# Altium PCB 175-00036, rev1, Super Sniffer.PcbDoc (part 4 of 4)
Units mil, origin at the board's own origin, x right, y up, seen from the top; angles counter-clockwise.
Board outline 6299.21 x 7874.02 mil, 5 copper layers (Top Layer (*.GTL), Mid-Layer 1 (*.G1), Internal Plane 1 (*.GP1), Mid-Layer 2  (*.G2), Bottom Layer (*.GBL)); 205 components, 359 nets, 1160 pads, 445 vias.
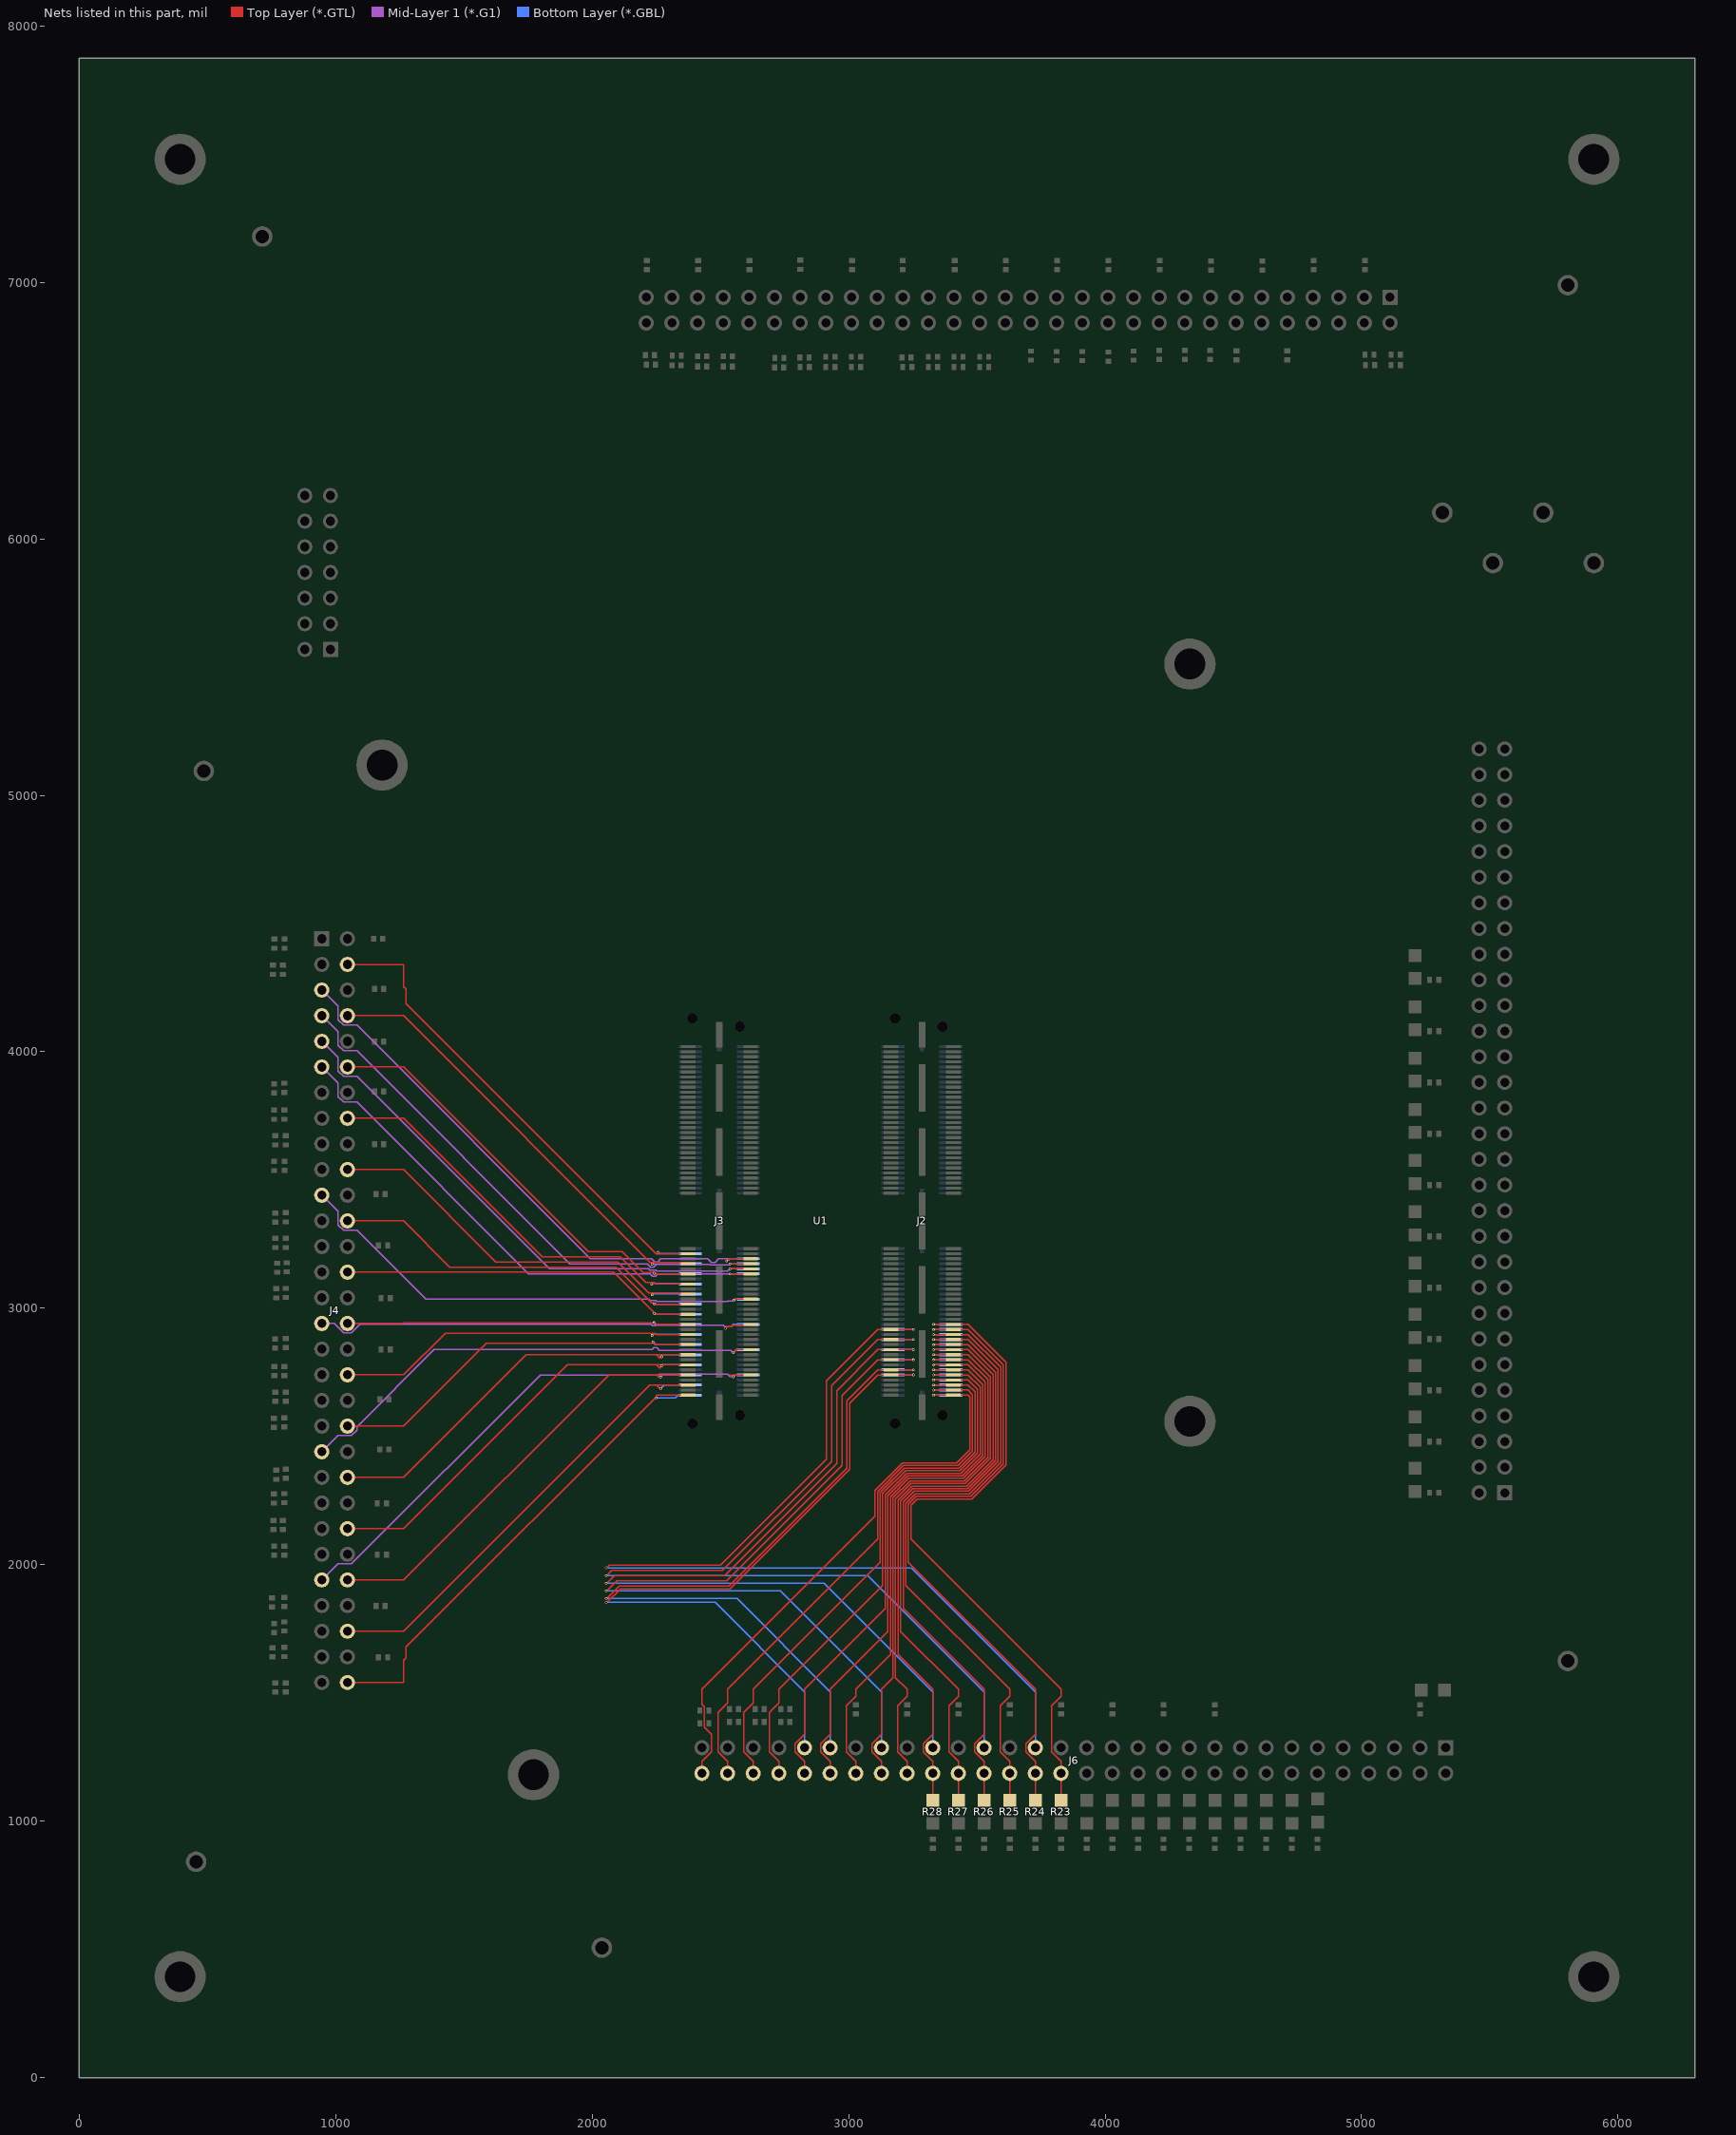
[diagram p7: the nets of this part, all layers, seen from the top]

## Via types
v1: diameter 10, hole 6, Top Layer (*.GTL) to Bottom Layer (*.GBL), 437 vias
v2: diameter 20, hole 10, Top Layer (*.GTL) to Bottom Layer (*.GBL), 8 vias

## Nets (pads, with @x,y where several pads share a name; then routed paths per layer and width w, separated by ;. In a path a pad name is that pad's centre, name@x,y a point inside that pad or via, vN(x,y) a via of type N, cw(c..) or ccw(c..) an arc to the next point about the centre after c; other vN are vias at no path point) (continued)
NetJ2_91: J2.91 J6.32 R23.1 U1.A91 | length 2669.8
  Top Layer (*.GTL) w5: v1(3331.05,2937.13) U1.A91@3408.2,2937.13 3466.05,2937.13 3613.05,2790.13 3613.05,2389.82 3480.04,2256.81 3267.91,2256.81 3243.05,2231.95 3243.05,2099.81 3828.05,1514.81 3828.05,1486.79 3791.02,1449.76 3791.02,1271.47 3828.05,1234.45 J6.32@3828.05,1186.81 R23.1@3828.05,1081.81
  Bottom Layer (*.GBL) w5: v1(3331.05,2937.13) 3331.13,2937.21 J2.91@3399.04,2937.21
NetJ2_93: J2.93 J6.34 R24.1 U1.A93 | length 2608.6
  Top Layer (*.GTL) w5: v1(3331.05,2917.45) U1.A93@3408.2,2917.45 3466.05,2917.45 3603.05,2780.45 3603.05,2393.96 3475.9,2266.81 3263.76,2266.81 3233.05,2236.1 3233.05,2009.81 3728.05,1514.81 3728.05,1339.18 3691.02,1302.15 3691.02,1271.47 3728.05,1234.45 J6.34@3728.05,1186.81 R24.1@3728.05,1081.81
  Bottom Layer (*.GBL) w5: v1(3331.05,2917.45) 3331.11,2917.51 J2.93@3399.04,2917.51
NetJ2_94: J2.94 J6.33 U1.A94 | length 3933.4
  Top Layer (*.GTL) w5: v1(2055.05,1988.35) 2057.72,1988.35 2067.19,1997.81 2500.32,1997.81 2914.05,2411.54 2914.05,2717.45 3114.05,2917.45 U1.A94@3164.9,2917.45 3196.05,2917.45 3196.11,2917.51 v1(3253.05,2917.51)
  Bottom Layer (*.GBL) w5: v1(2055.05,1988.35) 3244.51,1988.35 3728.05,1504.81 J6.33@3728.05,1286.81 ; J2.94@3173.06,2917.51 v1(3253.05,2917.51)
NetJ2_95: J2.95 J6.36 R25.1 U1.A95 | length 2547.5
  Top Layer (*.GTL) w5: v1(3331.05,2897.76) U1.A95@3408.2,2897.76 3466.05,2897.76 3593.05,2770.76 3593.05,2398.1 3471.75,2276.81 3259.62,2276.81 3223.05,2240.24 3223.05,1919.81 3628.05,1514.81 3628.05,1486.79 3591.02,1449.76 3591.02,1271.47 3628.05,1234.45 J6.36@3628.05,1186.81 R25.1@3628.05,1081.81
  Bottom Layer (*.GBL) w5: v1(3331.05,2897.76) 3331.1,2897.81 J2.95@3399.04,2897.81
NetJ2_97: J2.97 J6.38 R26.1 U1.A97 | length 2486.4
  Top Layer (*.GTL) w5: v1(3331.05,2878.08) U1.A97@3408.2,2878.08 3466.05,2878.08 3583.05,2761.08 3583.05,2402.25 3467.61,2286.81 3255.48,2286.81 3213.05,2244.38 3213.05,1829.81 3528.05,1514.81 3528.05,1339.18 3491.02,1302.15 3491.02,1271.47 3528.05,1234.45 J6.38@3528.05,1186.81 R26.1@3528.05,1081.81
  Bottom Layer (*.GBL) w5: v1(3331.05,2878.08) 3331.08,2878.11 J2.97@3399.04,2878.11
NetJ2_98: J2.98 J6.37 U1.A98 | length 3710.5
  Top Layer (*.GTL) w5: v1(2055.05,1958.35) 2057.72,1958.35 2077.19,1977.81 2508.61,1977.81 2934.05,2403.25 2934.05,2698.08 3114.05,2878.08 U1.A98@3164.9,2878.08 3196.05,2878.08 3196.08,2878.11 v1(3253.05,2878.11)
  Bottom Layer (*.GBL) w5: v1(2055.05,1958.35) 3074.51,1958.35 3528.05,1504.81 J6.37@3528.05,1286.81 ; J2.98@3173.06,2878.11 v1(3253.05,2878.11)
NetJ2_99: J2.99 J6.40 R27.1 U1.A99 | length 2425.3
  Top Layer (*.GTL) w5: v1(3331.05,2858.39) U1.A99@3408.2,2858.39 3466.05,2858.39 3573.05,2751.39 3573.05,2406.39 3463.47,2296.81 3251.34,2296.81 3203.05,2248.52 3203.05,1739.81 3428.05,1514.81 3428.05,1486.79 3391.02,1449.76 3391.02,1271.47 3428.05,1234.45 J6.40@3428.05,1186.81 R27.1@3428.05,1081.81
  Bottom Layer (*.GBL) w5: v1@3331.07,2858.41 J2.99@3399.04,2858.41
NetJ2_101: J2.101 J6.42 R28.1 U1.A101 | length 2364.2
  Top Layer (*.GTL) w5: R28.1@3328.05,1081.81 J6.42@3328.05,1186.81 3328.05,1234.45 3291.02,1271.47 3291.02,1302.15 3328.05,1339.18 3328.05,1514.81 3193.05,1649.81 3193.05,2252.66 3247.19,2306.81 3459.33,2306.81 3563.05,2410.53 3563.05,2741.71 3466.05,2838.71 U1.A101@3408.2,2838.71 v1(3331.05,2838.71)
  Bottom Layer (*.GBL) w5: v1(3331.05,2838.71) J2.101@3399.04,2838.71
NetJ2_102: J2.102 J6.41 U1.A102 | length 3487.7
  Top Layer (*.GTL) w5: v1(2055.05,1928.35) 2057.72,1928.35 2087.19,1957.81 2516.89,1957.81 2954.05,2394.97 2954.05,2678.71 3114.05,2838.71 U1.A102@3164.9,2838.71 3196.05,2838.71 v1(3253.05,2838.71)
  Bottom Layer (*.GBL) w5: v1(2055.05,1928.35) 2904.51,1928.35 3328.05,1504.81 J6.41@3328.05,1286.81 ; J2.102@3173.06,2838.71 v1(3253.05,2838.71)
NetJ2_103: J2.103 J6.44 U1.A103 | length 2198.1
  Top Layer (*.GTL) w5: J6.44@3228.05,1186.81 3228.05,1234.45 3191.02,1271.47 3191.02,1449.76 3228.05,1486.79 3228.05,1514.81 3183.05,1559.81 3183.05,2256.81 3243.05,2316.81 3455.18,2316.81 3553.05,2414.67 3553.05,2732.02 3466.05,2819.02 U1.A103@3408.2,2819.02 v1(3331.05,2819.02)
  Bottom Layer (*.GBL) w5: v1(3331.05,2819.02) 3351.04,2819.02 J2.103@3399.04,2819.01
NetJ2_105: J2.105 J6.46 U1.A105 | length 2174.3
  Top Layer (*.GTL) w5: J6.46@3128.05,1186.81 3128.05,1234.45 3091.02,1271.47 3091.02,1302.15 3128.05,1339.18 3128.05,1514.81 3173.05,1559.81 3173.05,2260.95 3238.91,2326.81 3451.04,2326.81 3543.05,2418.82 3543.05,2722.34 3466.05,2799.34 U1.A105@3408.2,2799.34 v1(3331.05,2799.34)
  Bottom Layer (*.GBL) w5: v1(3331.05,2799.34) 3351.02,2799.34 ; 3351.05,2799.31 J2.105@3399.04,2799.31
NetJ2_106: J2.106 J6.45 U1.A106 | length 3264.9
  Top Layer (*.GTL) w5: v1(2055.05,1898.35) 2057.72,1898.35 2097.19,1937.81 2525.17,1937.81 2974.05,2386.68 2974.05,2659.34 3114.05,2799.34 U1.A106@3164.9,2799.34 v1(3253.05,2799.31)
  Bottom Layer (*.GBL) w5: v1(2055.05,1898.35) 2734.51,1898.35 3128.05,1504.81 J6.45@3128.05,1286.81 ; J2.106@3173.06,2799.31 v1(3253.05,2799.31)
NetJ2_107: J2.107 J6.48 U1.A107 | length 2187.7
  Top Layer (*.GTL) w5: J6.48@3028.05,1186.81 3028.05,1234.45 2991.02,1271.47 2991.02,1449.76 3028.05,1486.79 3028.05,1514.81 3163.05,1649.81 3163.05,2265.09 3234.77,2336.81 3446.9,2336.81 3533.05,2422.96 3533.05,2712.65 3466.05,2779.65 U1.A107@3408.2,2779.65 v1(3331.05,2779.65)
  Bottom Layer (*.GBL) w5: v1(3331.05,2779.65) 3351.01,2779.65 3351.05,2779.61 J2.107@3399.04,2779.61
NetJ2_109: J2.109 J6.50 U1.A109 | length 2201.2
  Top Layer (*.GTL) w5: J6.50@2928.05,1186.81 2928.05,1234.45 2891.02,1271.47 2891.02,1302.15 2928.05,1339.18 2928.05,1514.81 3153.05,1739.81 3153.05,2269.23 3230.63,2346.81 3442.76,2346.81 3523.05,2427.1 3523.05,2702.97 3466.05,2759.97 U1.A109@3408.2,2759.97 v1(3331.05,2759.97)
  Bottom Layer (*.GBL) w5: v1(3331.05,2759.97) 3350.99,2759.97 3351.05,2759.91 J2.109@3399.04,2759.91
NetJ2_110: J2.110 J6.49 U1.A110 | length 3042.9
  Top Layer (*.GTL) w5: v1(2055.05,1868.35) 2057.72,1868.35 2106.29,1916.92 2533.83,1916.92 2994.05,2377.13 2994.05,2639.97 3114.05,2759.97 U1.A110@3164.9,2759.97 3252.99,2759.97 v1(3253.05,2759.91)
  Bottom Layer (*.GBL) w5: v1(2055.05,1868.35) 2564.51,1868.35 2928.05,1504.81 J6.49@2928.05,1286.81 ; J2.110@3173.06,2759.91 v1(3253.05,2759.91)
NetJ2_111: J2.111 J6.52 U1.A111 | length 2214.6
  Top Layer (*.GTL) w5: J6.52@2828.05,1186.81 2828.05,1234.45 2791.02,1271.47 2791.02,1302.15 2828.05,1339.18 2828.05,1514.81 3143.05,1829.81 3143.05,2273.37 3226.48,2356.81 3438.62,2356.81 3513.05,2431.24 3513.05,2693.28 3466.05,2740.28 U1.A111@3408.2,2740.28 v1(3331.05,2740.28)
  Bottom Layer (*.GBL) w5: v1(3331.05,2740.28) 3350.98,2740.28 3351.05,2740.21 J2.111@3399.04,2740.21
NetJ2_112: J2.112 J6.51 U1.A112 | length 2932
  Top Layer (*.GTL) w5: v1(2055.05,1853.35) 2057.72,1853.35 2110.69,1906.31 2538.22,1906.31 3004.05,2372.13 3004.05,2630.28 3114.05,2740.28 U1.A112@3164.9,2740.28 3252.98,2740.28 v1(3253.05,2740.21)
  Bottom Layer (*.GBL) w5: v1(2055.05,1853.35) 2479.51,1853.35 2828.05,1504.81 J6.51@2828.05,1286.81 ; J2.112@3173.06,2740.21 v1(3253.05,2740.21)
NetJ2_113: J2.113 J6.54 U1.A113 | length 2228.1
  Top Layer (*.GTL) w5: J6.54@2728.05,1186.81 2728.05,1234.45 2691.02,1271.47 2691.02,1424.76 2728.05,1461.79 2728.05,1514.81 3133.05,1919.81 3133.05,2277.52 3222.34,2366.81 3434.47,2366.81 3503.05,2435.38 3503.05,2683.6 3466.05,2720.6 U1.A113@3408.2,2720.6 v1(3331.05,2720.6)
  Bottom Layer (*.GBL) w5: v1(3331.05,2720.6) 3350.96,2720.6 3351.05,2720.51 J2.113@3399.04,2720.51
NetJ2_115: J2.115 J6.56 U1.A115 | length 2241.6
  Top Layer (*.GTL) w5: J6.56@2628.05,1186.81 2628.05,1234.45 2591.02,1271.47 2591.02,1424.76 2628.05,1461.79 2628.05,1514.81 3123.05,2009.81 3123.05,2281.66 3218.2,2376.81 3430.33,2376.81 3493.05,2439.53 3493.05,2673.91 3466.05,2700.91 U1.A115@3408.2,2700.91 v1(3331.05,2700.91)
  Bottom Layer (*.GBL) w5: v1(3331.05,2700.91) 3350.95,2700.91 3351.05,2700.81 J2.115@3399.04,2700.81
NetJ2_117: J2.117 J6.58 U1.A117 | length 2255
  Top Layer (*.GTL) w5: J6.58@2528.05,1186.81 2528.05,1234.45 2491.02,1271.47 2491.02,1424.76 2528.05,1461.79 2528.05,1514.81 3113.05,2099.81 3113.05,2285.8 3214.06,2386.81 3426.19,2386.81 3483.05,2443.67 3483.05,2664.23 3466.05,2681.23 U1.A117@3408.2,2681.23 v1(3331.05,2681.23)
  Bottom Layer (*.GBL) w5: v1(3331.05,2681.23) 3350.93,2681.23 3351.05,2681.11 J2.117@3399.04,2681.11
NetJ2_119: J2.119 J6.60 U1.A119 | length 2269
  Top Layer (*.GTL) w5: J6.60@2428.05,1186.81 2428.05,1234.45 2465.07,1271.47 2465.07,1339.52 2437.7,1366.89 2437.7,1445.98 2428.05,1455.64 2428.05,1514.81 3103.05,2189.81 3103.05,2289.94 3209.92,2396.81 3422.05,2396.81 3473.05,2447.81 3473.05,2654.54 3466.05,2661.54 U1.A119@3408.2,2661.54 v1(3331.05,2661.54)
  Bottom Layer (*.GBL) w5: v1(3331.05,2661.54) 3350.92,2661.54 3351.05,2661.41 J2.119@3399.04,2661.41 J2.119@3398.64,2661.81
NetJ3_64: J3.64 J4.4 U1.B64 | length 2019.5
  Top Layer (*.GTL) w5: J4.4@1046.05,4340.81 1265.05,4340.81 1265.05,4250.81 1269.19,4250.81 1275.05,4244.95 1275.05,4187.72 2250.05,3212.72 ; v1(2256.89,3218.04) 2255.36,3218.04 2250.05,3212.72 ; U1.B64@2374.74,3212.72 2250.05,3212.72
  Bottom Layer (*.GBL) w5: v1(2256.89,3218.04) 2261.92,3213.01 J3.64@2383.06,3213.01
NetJ3_65: J3.65 J4.5 U1.B65 | length 2278
  Top Layer (*.GTL) w5: v1(2525.05,3183.81) 2526.29,3183.81 2535.52,3193.04 U1.B65@2618.05,3193.04
  Mid-Layer 1 (*.G1) w5: J4.5@946.05,4240.81 1009.02,4177.84 1009.02,4125.47 1030.71,4103.78 1083.07,4103.78 1993.82,3193.04 2232.37,3193.04 2244.87,3180.54 2255.22,3180.54 2267.72,3193.04 2451.07,3193.04 2464.8,3179.31 2479.3,3179.31 2493.02,3193.04 2537.05,3193.04 2531.73,3187.72 2528.96,3187.72 v1(2525.05,3183.81)
  Bottom Layer (*.GBL) w5: v1(2525.05,3183.81) 2534.55,3193.31 J3.65@2609.04,3193.31
NetJ3_67: J3.67 J4.7 U1.B67 | length 2187.8
  Top Layer (*.GTL) w5: v1(2537.05,3173.35) U1.B67@2618.05,3173.35
  Mid-Layer 1 (*.G1) w5: J4.7@946.05,4140.81 1009.02,4077.84 1009.02,4025.47 1030.71,4003.78 1083.07,4003.78 1913.5,3173.35 2214.83,3173.35 2228.87,3159.31 2239.22,3159.31 2250.45,3170.54 2459.43,3170.54 2460.66,3169.31 2533,3169.31 v1(2537.05,3173.35)
  Bottom Layer (*.GBL) w5: v1@2537.31,3173.61 J3.67@2609.04,3173.61
NetJ3_68: J3.68 J4.8 U1.B68 | length 1892.1
  Top Layer (*.GTL) w5: J4.8@1046.05,4140.81 1265.05,4140.81 2227.19,3178.67 2243.2,3178.67 ; v1(2234.05,3171.81) 2242.05,3179.81 2243.2,3178.67 ; U1.B68@2374.74,3173.35 2369.43,3178.67 2243.2,3178.67
  Bottom Layer (*.GBL) w5: v1(2234.05,3171.81) 2235.85,3173.61 J3.68@2383.06,3173.61
NetJ3_69: J3.69 J4.9 U1.B69 | length 2148.8
  Top Layer (*.GTL) w5: v1(2537.05,3153.67) U1.B69@2618.05,3153.67
  Mid-Layer 1 (*.G1) w5: J4.9@946.05,4040.81 1009.02,3977.84 1009.02,3925.47 1030.71,3903.78 1083.07,3903.78 1833.19,3153.67 2220.37,3153.67 2224.73,3149.31 2247.87,3149.31 2251.87,3145.31 2528.69,3145.31 v1(2537.05,3153.67)
  Bottom Layer (*.GBL) w5: v1@2537.29,3153.91 J3.69@2609.04,3153.91
NetJ3_71: J3.71 J4.11 U1.B71 | length 2116.6
  Top Layer (*.GTL) w5: v1(2537.05,3133.98) U1.B71@2618.05,3133.98
  Mid-Layer 1 (*.G1) w5: J4.11@946.05,3940.81 1009.02,3877.84 1009.02,3825.47 1030.71,3803.78 1083.07,3803.78 1752.87,3133.98 2226.2,3133.98 2235.87,3124.31 2246.22,3124.31 2255.9,3133.98 v1(2537.05,3133.98)
  Bottom Layer (*.GBL) w5: v1@2537.28,3134.21 J3.71@2609.04,3134.21
NetJ3_72: J3.72 J4.12 U1.B72 | length 1809.4
  Top Layer (*.GTL) w5: J4.12@1046.05,3940.81 1265.05,3940.81 1985.05,3220.81 2117.35,3220.81 2198.86,3139.3 v1@2243.2,3139.3 ; v1(2241.05,3136.81) 2241.05,3137.14 v1@2243.2,3139.3 ; U1.B72@2374.74,3133.98 2250.05,3133.98 2244.73,3139.3 v1@2243.2,3139.3
  Bottom Layer (*.GBL) w5: v1(2241.05,3136.81) 2243.55,3134.31 2334.95,3134.31 2335.05,3134.21 J3.72@2383.06,3134.21
NetJ3_76: J3.76 J4.16 U1.B76 | length 1764.5
  Top Layer (*.GTL) w5: J4.16@1046.05,3740.81 1265.05,3740.81 1805.05,3200.81 2109.06,3200.81 2209.95,3099.93 2243.2,3099.93 ; v1(2232.05,3092.81) 2234.05,3094.81 2238.09,3094.81 2243.2,3099.93 ; U1.B76@2374.74,3094.61 2248.52,3094.61 2243.2,3099.93
  Bottom Layer (*.GBL) w5: v1(2232.05,3092.81) 2236.67,3097.43 2332.43,3097.43 2335.05,3094.81 J3.76@2383.06,3094.81
NetJ3_80: J3.80 J4.20 U1.B80 | length 1690.7
  Top Layer (*.GTL) w5: J4.20@1046.05,3540.81 1265.05,3540.81 1625.05,3180.81 2100.78,3180.81 2221.03,3060.56 2243.2,3060.56 ; v1(2235.05,3052.81) 2235.05,3053.02 2242.89,3060.87 2243.2,3060.56 ; U1.B80@2374.74,3055.24 2369.43,3060.56 2243.2,3060.56
  Bottom Layer (*.GBL) w5: v1(2235.05,3052.81) 2237.65,3055.41 J3.80@2383.06,3055.41
NetJ3_81: J3.81 J4.21 U1.B81 | length 1930.3
  Top Layer (*.GTL) w5: v1(2553,3031.76) 2556.8,3035.56 U1.B81@2618.05,3035.56
  Mid-Layer 1 (*.G1) w5: J4.21@946.05,3440.81 1009.02,3377.84 1009.02,3325.47 1030.71,3303.78 1083.07,3303.78 1351.3,3035.56 2220.48,3035.56 2225.73,3030.31 2248.87,3030.31 2252.87,3026.31 2527.8,3026.31 2529.86,3028.37 2549.61,3028.37 v1(2553,3031.76)
  Bottom Layer (*.GBL) w5: 2556.95,3035.71 J3.81@2609.04,3035.71
NetJ3_84: J3.84 J4.24 U1.B84 | length 1610.7
  Top Layer (*.GTL) w5: J4.24@1046.05,3340.81 1265.05,3340.81 1445.05,3160.81 2092.5,3160.81 2232.12,3021.19 v1@2243.2,3021.19 ; v1(2241.05,3017.81) 2241.05,3019.03 v1@2243.2,3021.19 ; U1.B84@2374.74,3015.87 2374.3,3016.31 2252.87,3016.31 2252.43,3015.87 2250.05,3015.87 2244.73,3021.19 v1@2243.2,3021.19
  Bottom Layer (*.GBL) w5: v1(2241.05,3017.81) 2242.84,3016.01 J3.84@2383.06,3016.01
NetJ3_88: J3.88 J4.28 U1.B88 | length 1541.7
  Top Layer (*.GTL) w5: J4.28@1046.05,3140.81 2084.21,3140.81 v1@2243.2,2981.82 ; v1(2242.05,2980.81) 2242.2,2980.81 v1@2243.2,2981.82 ; U1.B88@2374.74,2976.5 2373.93,2977.31 2252.87,2977.31 2252.06,2976.5 2250.05,2976.5 2244.73,2981.82 v1@2243.2,2981.82
  Bottom Layer (*.GBL) w5: v1(2242.05,2980.81) 2246.24,2976.61 J3.88@2383.06,2976.61
NetJ3_91: J3.91 J4.31 U1.B91 | length 1815.7
  Top Layer (*.GTL) w5: v1(2520.05,2921.81) 2526.55,2928.31 2542.22,2928.31 2547.22,2933.31 2614.22,2933.31 U1.B91@2618.05,2937.13
  Mid-Layer 1 (*.G1) w5: J4.31@946.05,2940.81 993.68,2940.81 1030.71,2903.78 1061.38,2903.78 1094.73,2937.13 2230.05,2937.13 2235.87,2931.31 2246.22,2931.31 2249.23,2934.32 2511.54,2934.32 2522.05,2923.81 v1(2520.05,2921.81)
  Bottom Layer (*.GBL) w5: v1(2520.05,2921.81) 2526.55,2928.31 2542.22,2928.31 2551.13,2937.21 J3.91@2609.04,2937.21
NetJ3_92: J3.92 J4.32 U1.B92 | length 1479.9
  Top Layer (*.GTL) w5: J4.32@1046.05,2940.81 1265.05,2940.81 1266.68,2942.45 v1@2243.2,2942.45 ; v1(2241.05,2943.81) 2241.05,2944.17 2241.27,2944.39 v1@2243.2,2942.45 ; U1.B92@2374.74,2937.13 2374.56,2937.31 2251.87,2937.31 2251.69,2937.13 2250.05,2937.13 2244.73,2942.45 v1@2243.2,2942.45
  Bottom Layer (*.GBL) w5: v1(2241.05,2943.81) 2247.64,2937.21 J3.92@2383.06,2937.21
NetJ3_96: J3.96 J4.36 U1.B96 | length 1562.2
  Top Layer (*.GTL) w5: J4.36@1046.05,2740.81 1265.05,2740.81 1427.31,2903.08 2243.2,2903.08 ; v1(2234.05,2893.81) 2236.05,2895.81 2236.05,2895.92 2243.2,2903.08 ; U1.B96@2374.74,2897.76 2250.05,2897.76 2244.73,2903.08 2243.2,2903.08
  Bottom Layer (*.GBL) w5: v1(2234.05,2893.81) 2238.55,2898.31 2382.56,2898.31 J3.96@2383.06,2897.81
NetJ3_100: J3.100 J4.40 U1.B100 | length 1623.2
  Top Layer (*.GTL) w5: J4.40@1046.05,2540.81 1265.05,2540.81 1587.94,2863.71 2243.2,2863.71 ; v1(2237.05,2868.81) 2239.05,2866.81 2240.1,2866.81 2243.2,2863.71 ; U1.B100@2374.74,2858.39 2250.05,2858.39 2244.73,2863.71 2243.2,2863.71
  Bottom Layer (*.GBL) w5: v1(2237.05,2868.81) 2247.44,2858.41 J3.100@2383.06,2858.41
NetJ3_101: J3.101 J4.41 U1.B101 | length 1923.9
  Top Layer (*.GTL) w5: v1(2551.05,2826.81) 2562.94,2838.71 U1.B101@2618.05,2838.71
  Mid-Layer 1 (*.G1) w5: J4.41@946.05,2440.81 1009.02,2503.78 1061.38,2503.78 1083.07,2525.47 1083.07,2537.52 1384.27,2838.71 2234.27,2838.71 2241.87,2846.31 2252.22,2846.31 2259.55,2838.99 2259.55,2837.29 2260.63,2836.21 2541.65,2836.21 v1(2551.05,2826.81)
  Bottom Layer (*.GBL) w5: v1(2551.05,2826.81) 2562.95,2838.71 J3.101@2609.04,2838.71
NetJ3_104: J3.104 J4.44 U1.B104 | length 1688.5
  Top Layer (*.GTL) w5: J4.44@1046.05,2340.81 1265.05,2340.81 1743.26,2819.02 2250.05,2819.02 ; v1(2272.05,2810.81) 2272.05,2809.81 2266.05,2809.81 2266.05,2804.81 2265.79,2804.81 2256.89,2813.71 2255.36,2813.71 2250.05,2819.02 ; U1.B104@2374.74,2819.02 2250.05,2819.02
  Bottom Layer (*.GBL) w5: v1(2272.05,2810.81) 2272.05,2809.81 2266.05,2809.81 2275.25,2819.01 J3.104@2383.06,2819.01
NetJ3_108: J3.108 J4.48 U1.B108 | length 1741.6
  Top Layer (*.GTL) w5: J4.48@1046.05,2140.81 1265.05,2140.81 1903.89,2779.65 2250.05,2779.65 ; v1(2271.05,2775.81) 2266.05,2770.81 2266.05,2765.18 2256.89,2774.34 2255.36,2774.34 2250.05,2779.65 ; U1.B108@2374.74,2779.65 2250.05,2779.65
  Bottom Layer (*.GBL) w5: v1(2271.05,2775.81) 2274.85,2779.61 J3.108@2383.06,2779.61
NetJ3_111: J3.111 J4.51 U1.B111 | length 2099.9
  Top Layer (*.GTL) w5: v1(2550.05,2732.81) 2547.89,2734.97 2542.36,2734.97 2537.05,2740.28 U1.B111@2618.05,2740.28
  Mid-Layer 1 (*.G1) w5: J4.51@946.05,1940.81 1009.02,2003.78 1061.38,2003.78 1797.88,2740.28 2257.84,2740.28 2260.87,2743.31 2527.87,2743.31 2537.37,2733.81 2549.05,2733.81 v1(2550.05,2732.81)
  Bottom Layer (*.GBL) w5: v1(2550.05,2732.81) 2557.45,2740.21 J3.111@2609.04,2740.21
NetJ3_112: J3.112 J4.52 U1.B112 | length 1805.9
  Top Layer (*.GTL) w5: J4.52@1046.05,1940.81 1265.05,1940.81 2064.52,2740.28 2252.25,2740.28 ; v1(2266.05,2730.81) 2266.05,2725.81 2262.55,2729.31 2262.55,2729.99 2252.25,2740.28 ; U1.B112@2374.74,2740.28 2252.25,2740.28
  Bottom Layer (*.GBL) w5: v1(2266.05,2730.81) 2275.45,2740.21 J3.112@2383.06,2740.21
NetJ3_116: J3.116 J4.56 U1.B116 | length 1872.2
  Top Layer (*.GTL) w5: J4.56@1046.05,1740.81 1265.05,1740.81 2225.15,2700.91 2250.05,2700.91 ; v1(2268.05,2687.81) 2266.05,2685.81 2266.05,2686.44 2256.89,2695.6 2255.36,2695.6 2250.05,2700.91 ; U1.B116@2374.74,2700.91 2250.05,2700.91
  Bottom Layer (*.GBL) w5: v1(2268.05,2687.81) 2281.05,2700.81 J3.116@2383.06,2700.81
NetJ3_120: J3.120 J4.60 U1.B120 | length 2016.3
  Top Layer (*.GTL) w5: J4.60@1046.05,1540.81 1265.05,1540.81 1265.05,1630.81 1269.19,1630.81 1275.05,1636.67 1275.05,1679.81 v1@2250.05,2654.81 ; v1(2250.05,2650.81) v1@2250.05,2654.81 ; U1.B120@2374.74,2661.54 2250.05,2661.54 v1@2250.05,2654.81
  Bottom Layer (*.GBL) w5: v1(2250.05,2650.81) 2324.44,2650.81 2335.05,2661.41 J3.120@2383.06,2661.41
pads on no net: J2.0 J3.0 U1.0 U1.1
copper on no net: | length 292.9
  Bottom Layer (*.GBL) w10: 4767.62,7345 ccw(c4721,7345) 4767.62,7345

## Polygon pours and split planes (outlines as drawn)
GND on Internal Plane 1 (*.GP1) (split plane): 6279.12,20.1 20.1,20.1 20.1,7853.92 6279.12,7853.92

## Other copper
Top Layer (*.GTL):
  text "*.GTL - TOP LAYER GERBER DATA" at 2199,-1241 h80
Mid-Layer 1 (*.G1):
  text "*.G1 - MID LAYER 1 GERBER DATA" at 2199,-1241 h80
Mid-Layer 2  (*.G2):
  text "*.G2 - MID LAYER 2 GERBER DATA" at 2199,-1241 h80
Bottom Layer (*.GBL):
  text "175-00036, rev1" at 4735,7590 h50
  text "PCB, SUPER SNIFFER" at 4754,7464 h50
  text "c" at 4741,7327 h50
  text "2011, Las Cumbres Observatory" at 4612,7325 h50
  text "*.GBL - BOTTOM LAYER GERBER DATA" at 2199,-1241 h80
Internal Plane 1 (*.GP1) (plane layer: these items are gaps in the copper):
  text "*.GP1 - INTERNAL PLANE LAYER 1 GERBER DATA" at 2199,-1241 h80

## Silkscreen, mask and mechanical layers (free items; w line width, h text height)
Top Overlay:
  rectangle: 1392,7628 1601.05,7784
  text "780-00040 rev:" at 665,7681 h50
  text "SCH, SUPER SNIFFER BOARD" at 653,7552 h50
  text "GND" at 642,7274 h50
  text "GP_Out_D2" at 2236.05,7141.81 h50 r90
  text "GP_Out_D3" at 2436.05,7141.81 h50 r90
  text "GP_Out_D4" at 2636.05,7141.81 h50 r90
  text "GP_Out_D5" at 2836.05,7141.81 h50 r90
  text "GP_Out_D6" at 3036.05,7141.81 h50 r90
  text "GP_Out_D7" at 3236.05,7141.81 h50 r90
  text "GP_Out_D8" at 3436.05,7141.81 h50 r90
  text "GP_Out_D9" at 3636.05,7141.81 h50 r90
  text "GP_Out_D10" at 3836.05,7141.81 h50 r90
  text "GP_Out_D11" at 4036.05,7141.81 h50 r90
  text "GP_Out_D12" at 4236.05,7141.81 h50 r90
  text "GP_Out_D13" at 4436.05,7141.81 h50 r90
  text "GP_Out_D14" at 4636.05,7141.81 h50 r90
  text "GP_Out_D15" at 4836.05,7141.81 h50 r90
  text "GP_Out_D16" at 5036.05,7141.81 h50 r90
  text "GND" at 5743,7095 h50
  text "S2" at 2327.38,7066.81 h50 r90
  text "S3" at 2537.05,7066.81 h50 r90
  text "S4" at 2728.05,7066.81 h50 r90
  text "S5" at 2927.38,7066.81 h50 r90
  text "S6" at 3128.05,7066.81 h50 r90
  text "S7" at 3336.05,7066.81 h50 r90
  text "S8" at 3536.05,7066.81 h50 r90
  text "S9" at 3736.05,7066.81 h50 r90
  text "S11" at 4136.05,7066.81 h50 r90
  text "S12" at 4330.71,7066.81 h50 r90
  text "S13" at 4536.05,7066.81 h50 r90
  text "S14" at 4736.05,7066.81 h50 r90
  text "S15" at 4928.05,7066.81 h50 r90
  text "S16" at 5136.05,7066.81 h50 r90
  text "S10" at 3936.05,7058.81 h50 r90
  text "S1" at 4828.05,6667.81 h50 r90
  text "S0" at 4636.05,6658.01 h50 r90
  text "1" at 2534.05,6603.04 h50 r90
  text "1" at 3034.05,6603.04 h50 r90
  text "1" at 3534.05,6603.04 h50 r90
  text "3" at 2335.38,6593.27 h50 r90
  text "3" at 2835.38,6593.27 h50 r90
  text "3" at 3335.38,6593.27 h50 r90
  text "4" at 4036.05,6592.43 h50 r90
  text "4" at 4436.05,6592.43 h50 r90
  text "2" at 2436.05,6591.81 h50 r90
  text "2" at 2936.05,6591.81 h50 r90
  text "2" at 3436.05,6591.81 h50 r90
  text "2" at 3836.05,6591.81 h50 r90
  text "3" at 3936.05,6591.81 h50 r90
  text "2" at 4236.05,6591.81 h50 r90
  text "3" at 4336.05,6591.81 h50 r90
  text "HomeCom" at 2636.05,6416.81 h50 r90
  text "Step1" at 3736.05,6416.81 h50 r90
  text "~Home4" at 2236.05,6341.81 h50 r90
  text "PosLmtCom" at 3136.05,6341.81 h50 r90
  text "NegLimCom" at 3636.05,6341.81 h50 r90
  text "PosLmt4" at 2736.05,6291.81 h50 r90
  text "NegLim4" at 3236.05,6291.81 h50 r90
  text "GP_Out_D1" at 4736.05,6241.81 h50 r90
  text "GP_Out_D0" at 4536.05,6216.81 h50 r90
  text "Direction1" at 4136.05,6191.81 h50 r90
  text "3.3V" at 5252,6184 h50
  text "-12V" at 5619,6179 h50
  text "Opto_In_Com0" at 4936.05,6175 h50 r90
  text "Opto_Input0" at 5036.05,6141.81 h50 r90
  text "Opto_Input1" at 5136.05,6141.81 h50 r90
  text "+5V" at 5423,5998 h50
  text "+12V" at 5828,5981 h50
  text "GND HEADER" at 741,5650 h50 r90
  text "GND" at 417,5201 h50
  text "DAC_Out0" at 4958.05,5155.81 h50
  text "+5V" at 5683.05,5155.81 h50
  text "DAC_Out1" at 4983.05,5055.81 h50
  text "-12V" at 5658.05,5055.81 h50
  text "DAC_Out2" at 4958.05,4955.81 h50
  text "+12V" at 5658.05,4955.81 h50
  text "DAC_Out3" at 4958.05,4855.81 h50
  text "Analog_In7" at 5683.05,4855.81 h50
  text "DAC_Out4" at 4958.05,4755.81 h50
  text "Analog_In6" at 5683.05,4755.81 h50
  text "DAC_Out5" at 4958.05,4655.81 h50
  text "Analog_In5" at 5683.05,4655.81 h50
  text "DAC_Out6" at 4958.05,4555.81 h50
  text "Analog_In4" at 5683.05,4555.81 h50
  text "DAC_Out7" at 4958.05,4455.81 h50
  text "Analog_In3" at 5683.05,4455.81 h50
  text "Opto_Input2" at 196.05,4415.81 h50
  text "GP_Out_D17" at 1246.05,4415.81 h50
  text "QuadA1+" at 4833.05,4355.81 h50
  text "Analog_In2" at 5683.05,4355.81 h50
  text "S17" at 1172.33,4323.91 h50
  text "Opto_Input3" at 196.05,4315.81 h50
  text "QuadA1-" at 4833.05,4255.81 h50
  text "Analog_In1" at 5683.05,4255.81 h50
  text "EtherRx-" at 446.05,4215.81 h50
  text "GP_Out_D18" at 1246.05,4215.81 h50
  text "QuadB1+" at 4833.05,4155.81 h50
  text "Analog_In0" at 5683.05,4155.81 h50
  text "EtherRx+" at 446.05,4115.81 h50
  text "S18" at 1179.81,4115.81 h50
  text "QuadB1-" at 4833.05,4055.81 h50
  text "Analog_In11" at 5683.05,4055.81 h50
  text "EtherGND" at 446.05,4015.81 h50
  text "GP_Out_D19" at 1246.05,4015.81 h50
  text "Index1+" at 4833.05,3955.81 h50
  text "Analog_In10" at 5683.05,3955.81 h50
  text "S19" at 1171.05,3922.81 h50
  text "Opto_In_Com1" at 271.05,3915.81 h50
  text "Index1-" at 4833.05,3855.81 h50
  text "Analog_In9" at 5683.05,3855.81 h50
  text "Opto_Input4" at 171.05,3815.81 h50
  text "GP_Out_D20" at 1246.05,3815.81 h50
  text "QuadA2+" at 4733.05,3755.81 h50
  text "Analog_In8" at 5683.05,3755.81 h50
  text "S20" at 1163.05,3723 h50
  text "Opto_Input5" at 171.05,3715.81 h50
  text "QuadA2-" at 4733.05,3655.81 h50
  text "USB_VBUS" at 5683.05,3655.81 h50
  text "Opto_Input6" at 171.05,3615.81 h50
  text "GP_Out_D21" at 1246.05,3615.81 h50
  text "QuadB2+" at 4733.05,3555.81 h50
  text "USB_D-" at 5683.05,3555.81 h50
  text "S21" at 1157.65,3518.19 h50
  text "Opto_Input7" at 171.05,3515.81 h50
  text "QuadB2-" at 4733.05,3455.81 h50
  text "USB_D+" at 5683.05,3455.81 h50
  text "Opto_In_Com2" at 271.05,3415.81 h50
  text "GP_Out_D22" at 1246.05,3415.81 h50
  text "Index2+" at 4733.05,3355.81 h50
  text "Analog_In12" at 5683.05,3355.81 h50
  text "Opto_Input8" at 171.05,3315.81 h50
  text "S22" at 1155.05,3315.81 h50
  text "Index2-" at 4733.05,3255.81 h50
  text "Analog_In13" at 5683.05,3255.81 h50
  text "Opto_Input9" at 171.05,3215.81 h50
  text "GP_Out_D23" at 1246.05,3215.81 h50
  text "QuadA3+" at 4833.05,3155.81 h50
  text "Analog_In14" at 5683.05,3155.81 h50
  text "S23" at 1151.5,3122.41 h50
  text "Opto_Input10" at 146.05,3115.81 h50
  text "QuadA3-" at 4833.05,3055.81 h50
  text "Analog_In15" at 5683.05,3055.81 h50
  text "Opto_Input11" at 146.05,3015.81 h50
  text "GP_Out_D24" at 1271.05,3015.81 h50
  text "QuadB3+" at 4833.05,2955.81 h50
  text "nT RST" at 5683.05,2955.81 h50
  text "S24" at 1152.65,2917.51 h50
  text "Opto_In_Com3" at 271.05,2915.81 h50
  text "QuadB3-" at 4833.05,2855.81 h50
  text "nEMU" at 5683.05,2855.81 h50
  text "Opto_Input12" at 146.05,2815.81 h50
  text "GP_Out_D25" at 1271.05,2815.81 h50
  text "Index3+" at 4833.05,2755.81 h50
  text "TDI" at 5683.05,2755.81 h50
  text "S25" at 1151.5,2720.51 h50
  text "Opto_Input13" at 146.05,2715.81 h50
  text "Index3-" at 4833.05,2655.81 h50
  text "TMS" at 5683.05,2655.81 h50
  text "Opto_Input14" at 146.05,2615.81 h50
  text "GP_Out_D26" at 1271.05,2615.81 h50
  text "QuadA4+" at 4733.05,2555.81 h50
  text "TDO" at 5683.05,2555.81 h50
  text "S26" at 1157.33,2517.41 h50
  text "Opto_Input15" at 146.05,2515.81 h50
  text "QuadA4-" at 4733.05,2455.81 h50
  text "TCK" at 5683.05,2455.81 h50
  text "Opto_In_Com4" at 271.05,2415.81 h50
  text "GP_Out_D27" at 1271.05,2415.81 h50
  text "QuadB4+" at 4733.05,2355.81 h50
  text "RS485_H" at 5683.05,2355.81 h50
  text "S27" at 1151.5,2317.41 h50
  text "Opto_Input16" at 146.05,2315.81 h50
  text "QuadB4-" at 4733.05,2255.81 h50
  text "RS485_L" at 5683.05,2255.81 h50
  text "Opto_Input17" at 146.05,2215.81 h50
  text "GP_Out_D28" at 1271.05,2215.81 h50
  text "S28" at 1146.05,2117.81 h50
  text "Opto_Input18" at 146.05,2115.81 h50
  text "Opto_Input_Com6" at 2814.05,2109.81 h50 r270
  text "Opto_Input27" at 2403.05,2061.81 h50 r270
  text "Opto_Input26" at 2503.05,2061.81 h50 r270
  text "Opto_Input25" at 2603.05,2061.81 h50 r270
  text "Opto_Input24" at 2703.05,2061.81 h50 r270
  text "Opto_Out_C7" at 3003.05,2036.81 h50 r270
  text "Opto_Out_C6" at 3203.05,2036.81 h50 r270
  text "Opto_Out_C5" at 3403.05,2036.81 h50 r270
  text "Opto_Out_C4" at 3603.05,2036.81 h50 r270
  text "Opto_Out_C3" at 3803.05,2036.81 h50 r270
  text "Opto_Out_C2" at 4003.05,2036.81 h50 r270
  text "Opto_Out_C1" at 4203.05,2036.81 h50 r270
  text "Opto_Out_C0" at 4403.05,2036.81 h50 r270
  text "Opto_Input19" at 146.05,2015.81 h50
  text "GP_Out_D29" at 1271.05,2015.81 h50
  text "BF-FPGA_TDO" at 4703.05,1961.81 h50 r270
  text "TDO-App_TDI" at 4803.05,1936.81 h50 r270
  text "S29" at 1152.65,1916.92 h50
  text "Opto_In_Com5" at 271.05,1915.81 h50
  text "Index4-" at 5203.05,1911.81 h50 r270
  text "Index4+" at 5303.05,1911.81 h50 r270
  text "Opto_Input20" at 146.05,1815.81 h50
  text "GP_Out_D30" at 1271.05,1815.81 h50
  text "FPGA_TCK" at 4503.05,1811.81 h50 r270
  text "FPGA_TMS" at 4603.05,1811.81 h50 r270
  text "EtherTx+" at 4903.05,1786.81 h50 r270
  text "EtherTx-" at 5003.05,1786.81 h50 r270
  text "S30" at 1148.61,1722.41 h50
  text "Opto_Input21" at 146.05,1715.81 h50
  text "GND" at 5735,1709 h50
  text "Opto_Input22" at 146.05,1615.81 h50
  text "GP_Out_D31" at 1271.05,1615.81 h50
  text "VA25" at 5103.05,1586.81 h50 r270
  text "Opto_Input23" at 146.05,1515.81 h50
  text "S31" at 1152.65,1511.81 h50
  text "E0" at 4303.05,1486.81 h50 r270
  text "E6" at 3103.05,1481.81 h50 r270
  text "E3" at 3703.05,1481.81 h50 r270
  text "E1" at 4103.05,1481.81 h50 r270
  text "E7" at 2904.05,1480.81 h50 r270
  text "E5" at 3304.05,1480.81 h50 r270
  text "E4" at 3504.05,1478.53 h50 r270
  text "E2" at 3903.05,1472.81 h50 r270
  text "CAN_L" at 2403.05,1061.81 h50 r270
  text "CAN_H" at 2503.05,1061.81 h50 r270
  text "CANnode1" at 2603.05,1061.81 h50 r270
  text "CANnode0" at 2703.05,1061.81 h50 r270
  text "I2C_SCL" at 2803.05,1061.81 h50 r270
  text "I2C_SDA" at 2903.05,1061.81 h50 r270
  text "100Mbps" at 3003.05,1061.81 h50 r270
  text "Ether_FD" at 3103.05,1061.81 h50 r270
  text "Ether_Act" at 3203.05,1061.81 h50 r270
  text "SPI_SSEL1" at 4903.05,1061.81 h50 r270
  text "SPI_SS" at 5003.05,1061.81 h50 r270
  text "SPI_MISO" at 5103.05,1061.81 h50 r270
  text "SPI_MOSI" at 5203.05,1061.81 h50 r270
  text "SPI_SCLK" at 5303.05,1061.81 h50 r270
  text "GND" at 400,939 h50
  text "GP_I/Ospare15" at 3303.05,836.81 h50 r270
  text "GP_I/Ospare14" at 3403.05,836.81 h50 r270
  text "GP_I/Ospare13" at 3503.05,836.81 h50 r270
  text "GP_I/Ospare12" at 3603.05,836.81 h50 r270
  text "GP_I/Ospare11" at 3703.05,836.81 h50 r270
  text "GP_I/Ospare10" at 3803.05,836.81 h50 r270
  text "GP_I/Ospare9" at 3903.05,836.81 h50 r270
  text "GP_I/Ospare8" at 4003.05,836.81 h50 r270
  text "GP_I/Ospare7" at 4103.05,836.81 h50 r270
  text "GP_I/Ospare6" at 4203.05,836.81 h50 r270
  text "GP_I/Ospare5" at 4303.05,836.81 h50 r270
  text "GP_I/Ospare4" at 4403.05,836.81 h50 r270
  text "GP_I/Ospare3" at 4503.05,836.81 h50 r270
  text "GP_I/Ospare2" at 4603.05,836.81 h50 r270
  text "GP_I/Ospare1" at 4703.05,836.81 h50 r270
  text "GP_I/Ospare0" at 4803.05,836.81 h50 r270
  text "GND" at 1981,598 h50
  text "*.GTO - TOP OVERLAY GERBER DATA" at 2199,-1241 h80
Bottom Overlay:
  text "*GBO - BOTTOM OVERLAY GERBER DATA" at 2397,-1241 h80
Top Paste:
  text "*.GTP - TOP-SIDE SOLDER PASTE MASK" at 2396.99,-1240.99 h80
Bottom Paste:
  text "*.GBP - BOTTOM-SIDE SOLDER PASTE MASK" at 2396.99,-1240.99 h80
Top Solder:
  text "*.GTS - TOP SOLDER MASK GERBER DATA" at 2397,-1241 h80
Bottom Solder:
  rectangle: 3126,7248 4801,7698
  text "*.GBS - BOTTOM SOLDER MASK GERBER DATA" at 2397,-1241 h80
Mechanical 1:
  the board outline again, w40
Mechanical 2:
  lines w10: -11352,-6728 -11352,9272 9648,9272 9648,-6728 -11352,-6728 ; 5593,-6622 ccw(c5643,-6622) 5643,-6672 5973,-6672 ccw(c5973,-6632) 6013,-6632 6013,-6462 ccw(c5973,-6462) 5973,-6422 5593,-6422 5593,-6622 ; 5593,-6332 ccw(c5643,-6332) 5643,-6382 9543,-6382 ccw(c9543,-6332) 9593,-6332 9593,-6142 ccw(c9543,-6142) 9543,-6092 5593,-6092 5593,-6332 ; 5593,-6002 ccw(c5643,-6002) 5643,-6052 7523,-6052 ccw(c7523,-6002) 7573,-6002 7573,-5852 ccw(c7523,-5852) 7523,-5802 5593,-5802 5593,-6002 ; 5593,-5722 ccw(c5633,-5722) 5633,-5762 6443,-5762 ccw(c6443,-5712) 6493,-5712 6493,-5562 ccw(c6443,-5562) 6443,-5512 5593,-5512 5593,-5722 ; 6053,-6632 ccw(c6093,-6632) 6093,-6672 8053,-6672 ccw(c8053,-6632) 8093,-6632 8093,-6462 ccw(c8053,-6462) 8053,-6422 6053,-6422 6053,-6632 ; 6533,-5712 ccw(c6583,-5712) 6583,-5762 7523,-5762 ccw(c7523,-5712) 7573,-5712 7573,-5562 ccw(c7523,-5562) 7523,-5512 6533,-5512 6533,-5712 ; 7613,-6002 ccw(c7663,-6002) 7663,-6052 9543,-6052 ccw(c9543,-6002) 9593,-6002 9593,-5852 ccw(c9543,-5852) 9543,-5802 7613,-5802 7613,-6002 ; 7613,-5712 ccw(c7663,-5712) 7663,-5762 8603,-5762 ccw(c8603,-5712) 8653,-5712 8653,-5562 ccw(c8603,-5562) 8603,-5512 7613,-5512 7613,-5712 ; 8133,-6622 ccw(c8183,-6622) 8183,-6672 8513,-6672 ccw(c8513,-6632) 8553,-6632 8553,-6462 ccw(c8513,-6462) 8513,-6422 8133,-6422 8133,-6622 ; 8593,-6632 ccw(c8633,-6632) 8633,-6672 9543,-6672 ccw(c9543,-6622) 9593,-6622 9593,-6472 ccw(c9543,-6472) 9543,-6422 8593,-6422 8593,-6632 ; 8693,-5712 ccw(c8743,-5712) 8743,-5762 9543,-5762 ccw(c9543,-5712) 9593,-5712 9593,-5562 ccw(c9543,-5562) 9543,-5512 8693,-5512 8693,-5712
  lines w20: -11331.94,-6082.12 cw(c-11282,-6157) -11282,-6067 ; -11282,-6107 ccw(c-11282,-6157) -11332,-6157 -11332,-6647 ccw(c-11282,-6647) -11282,-6697 -8082,-6697 ccw(c-8082,-6647) -8032,-6647 -8032,-6307 ccw(c-8082,-6307) -8082,-6257 -10722,-6257 ; -8007.12,-6696.94 ccw(c-8082,-6647) -7992,-6647 -7992,-6307 ; 5549.17,-6711.98 cw(c5643,-6622) 5513,-6622 5513,-4952 cw(c5643,-4952) 5643,-4822 9543,-4822 cw(c9543,-4952) 9631.66,-4856.92 ; -3822,-6548 ccw(c-3692,-6548) -3692,-6678 1048,-6678 ccw(c1048,-6548) 1178,-6548 1178,-4958 ccw(c1048,-4958) 1048,-4828 -3692,-4828 ccw(c-3692,-4958) -3822,-4958 -3822,-6548 ; 5553,-6622 ccw(c5643,-6622) 5643,-6712 9543,-6712 ccw(c9543,-6622) 9633,-6622 9633,-4952 ccw(c9543,-4952) 9543,-4862 5643,-4862 ccw(c5643,-4952) 5553,-4952 5553,-6622
  lines w21.65: -10569.92,-2874.44 -4902.52,-2874.44 ; -10569.92,-2497.67 -4902.52,-2497.67 ; -10629.92,-5547.24 ccw(c-10507.87,-5547.24) -10507.87,-5669.29 -4964.57,-5669.29 ccw(c-4964.57,-5547.24) -4842.52,-5547.24 -4842.52,-1893.7 ccw(c-4964.57,-1893.7) -4964.57,-1771.65 -10507.87,-1771.65 ccw(c-10507.87,-1893.7) -10629.92,-1893.7 -10629.92,-5547.24
  lines w24: -1272,-6518 -1122,-6518 ; -1272,-6268 -1122,-6268 ; -1272,-6018 -1122,-6018 ; -1272,-5768 -1122,-5768 ; -1272,-5518 -1122,-5518
  lines w30: -11852,-7228 -11852,9772 10148,9772 10148,-7228 -11852,-7228
  lines w50: 5738,-5363 7388,-5363 ; 5738,-4983 7388,-4983 ; 7388,-5363 7388,-4983 ; 7388,-5363 5728,-5363 5728,-4983 7388,-4983
  text "NOTES (UNLESS OTHERWISE SPECIFIED):" at -11032,8748 h90
  text "GENERAL" at -10932,8548 h90
  text "1)" at -10832,8347.95 h75
  text "PCB IS 5-LAYER, .055\" THICK." at -10632,8347.97 h75
  text "2)" at -10832,8197.95 h75
  text "CONSTRUCTION IS SOLDER-MASK-OVER-BARE-COPPER (SMOBC)." at -10632,8197.95 h75
  text "3)" at -10832,8047.95 h75
  text "ACCEPTABILITY SHALL BE BASED ON IPC-A-600, CLASS 2." at -10632,8047.95 h75
  text "4)" at -10832,7897.95 h75
  text "THE FOLLOWING GERBER RS274X PHOTO TOOL FILES SHALL BE USED TO DEFINE ALL CIRCUIT FEATURES:" at -10632,7897.95 h75
  text "*.GTL - TOP LAYER GERBER DATA" at -10358,7687 h80
  text "*.G1 - MID LAYER 1 GERBER DATA" at -10358,7533.33 h80
  text "*.G2 - MID LAYER 2 GERBER DATA" at -10358,7379.67 h80
  text "*.GP1 - INTERNAL PLANE LAYER 1 GERBER DATA" at -10370.01,7244.09 h80
  text "*.GBL - BOTTOM LAYER GERBER DATA" at -10358,7074.34 h80
  text "*.GTO - TOP OVERLAY GERBER DATA" at -10358,6920.67 h80
  text "*.GTS - TOP SOLDER MASK GERBER DATA" at -10358,6767.01 h80
  text "*.GTP - TOP-SIDE SOLDER PASTE MASK" at -10358.01,6613.33 h80
  text "*GBO - BOTTOM OVERLAY GERBER DATA" at -10358,6459.68 h80
  text "*.GBS - BOTTOM SOLDER MASK GERBER DATA" at -10358,6306.01 h80
  text "*.GBP - BOTTOM-SIDE SOLDER PASTE MASK" at -10358.01,6152.34 h80
  text "5)" at -10929,4666.23 h75
  text "THE PHOTO TOOL SHALL NOT BE COMPENSATED WITHOUT PRIOR ENGINEERING APPROVAL." at -10729,4666.23 h75
  text "PCB DESIGNER: RICH LOBDILL   PH (805) 880-1621  FAX (805) 961-1792." at -10729,4516.28 h75
  text "FABRICATION TOLERANCES" at -10874,4190 h90
  text "6)" at -10774,3989.95 h75
  text "END PRODUCT CONDUCTOR WIDTHS AND PAD DIAMETERS SHALL NOT VARY MORE THAN" at -10574,3989.95 h75
  text "0.002\" FROM THE 1:1 DIMENSIONS OF THE MASTER ARTWORK." at -10574,3840 h75
  text "7)" at -10774,3689.95 h75
  text "THE CONDUCTIVE PATTERN SHALL BE POSITIONED SO THAT THE LOCATION OF ANY PAD OR" at -10574,3689.95 h75
  text "LAND SHALL BE WITHIN 0.005\" DIAMETER TO THE TRUE POSITION OF THE HOLE IT CIRCUMSCRIBES." at -10574,3540 h75
  text "8)" at -10774,3389.95 h75
  text "ALL DRILL HOLE SIZES AND TOLERANCES APPLY AFTER PLATING EXCEPT 6mil VIA HOLES" at -10574,3389.95 h75
  text "9)" at -10774,3239.95 h75
  text "BREAKOUT OK ON 6mil VIAS (6mil VIAs OK'd by Alex Chandy per telecon 11/8/2011)" at -10574,3239.95 h75
  text "10)" at -10829,3089.95 h75
  text "BOW AND TWIST SHALL NOT EXCEED 0.010\" PER INCH." at -10574,3089.95 h75
  text "11)" at -10819,2939.95 h75
  text "FOR PCB ROUTING DIMENSIONS: .XXX = +/-.005\"  .XX = +/-.020\"" at -10574,2939.95 h75
  text "MATERIAL" at -10874,2740 h90
  text "12)" at -10829,2539.95 h75
  text "BASE MATERIAL IS FR4 EPOXY FIBERGLASS" at -10567,2534 h75
  text "SEE STACK-UP LEGEND FOR COPPER CLADDING CALL OUTS" at -10567,2394 h75
  text "13)" at -10829,2389.95 h75
  text "PLATING" at -10874,2190 h90
  text "14)" at -10829,1994.95 h75
  text "ALL HOLES AND CONDUCTIVE SURFACES SHALL BE PLATED WITH A MINIMUM OF 0.001\" COPPER." at -10574,1994.95 h75
  text "15)" at -10829,1844.95 h75
  text "AFTER SOLDERMASK, ALL EXPOSED HOLES AND CONDUCTIVE SURFACES SHALL BE COATED" at -10574,1844.95 h75
  text "WITH A GOLD IMMERSION PLATING TO PRESERVE SOLDERABILITY." at -10567,1694 h75
  text "16)" at -10803,1512 h75
  text "COPPER THEVING ON LAYERS AS NEEDED" at -10564,1509.95 h75
  text "COATINGS" at -10874,1200 h90
  text "THE SOLDERMASK SHALL BE BLACK LIQUID PHOTO-IMAGEABLE PER IPC-SM-840, TYPE-B, CLASS 2." at -10574,1004.95 h75
  text "17)" at -10818,1002 h75
  text "THE SOLDERMASK REGISTRATION ALLOWANCE IS 0.003\".  THERE SHALL BE NO SOLDERMASK ON" at -10574,854.95 h75
  text "18)" at -10828,827 h75
  text "ANY SOLDER PAD OR LAND." at -10574,704.95 h75
  text "MARKING" at -10874,505 h90
  text "THE LEGEND SHALL BE SCREEN-PRINTED USING PERMANENT YELLOW EPOXY INK." at -10574,309.95 h75
  text "19)" at -10833,307 h75
  text "THE SCREEN PRINTING REGISTRATION ALLOWANCE IS 0.007\".  THERE SHALL BE NO INK ON ANY" at -10574,159.95 h75
  text "20)" at -10833,142 h75
  text "SOLDER PAD OR LAND." at -10574,10 h75
  text "21)" at -10829,-125.05 h75
  text "THE VENDOR CODE AND UL FLAMMABILITY RATING MAY BE ETCHED IN THE FOIL OR MARKED IN" at -10574,-140.05 h75
  text "PERMANENT EPOXY INK (VENDOR'S OPTION)." at -10574,-290 h75
  text "ELECTRICAL TESTING" at -10874,-490 h90
  text "22)" at -10829,-685.05 h75
  text "ALL BOARDS SHALL BE ELECTRICALLY TESTED TO THE SUPPLIED IPC-D-356A NET LIST" at -10574,-685.05 h75
  text "FOR CONTINUITY, OPENS AND SHORTS." at -10574,-835 h75
  text "Layer Stack Up Detail for: 175-00036, rev1, Super Sniffer.PcbDoc" at -10569.92,-2193.12 h86.61
  text "Layer" at -10569.92,-2638.41 h86.61
  text "COPPER THICKNESS" at -7007.87,-2755.91 h100
  text "Name" at -10569.92,-2811.64 h86.61
  text "Top Layer (*.GTL)" at -10569.92,-3143.67 h122.05
  text "1/2 oz,  1 oz Finished" at -7401.57,-3149.61 h100
  text "1/2 oz" at -7440.94,-3622.05 h100
  text "Mid-Layer 1 (*.G1)" at -10569.92,-3660.47 h122.05
  text "1/2 oz" at -7440.94,-4133.86 h100
  text "Internal Plane 1 (*.GP1)" at -10551.18,-4173.23 h122.05
  text "1/2 oz" at -7480.31,-4645.67 h100
  text "Mid-Layer 2  (*.G2)" at -10511.81,-4685.04 h122.05
  text "Las Cumbres Observatory, Inc." at 7558,-5003 h90
  text "Las Cumbres Observatory" at 5788,-5123 h150
  text "PRIMARY PCB SPECIFICATIONS" at -3375,-5138 h200
  text "1/2 oz,  1 oz Finished" at -7480.31,-5157.48 h100
  text "6740 Cortona Dr." at 7998,-5157 h90
  text "Bottom Layer (*.GBL)" at -10569.92,-5210.89 h122.05
  text "Global Telescope Network" at 5948,-5283 h125
  text "Goleta, CA 93117" at 7948,-5307 h90
  text "(REFER TO COMPLETE SPEC LISTING AT LEFT FOR FURTHER DETAILS)" at -3722,-5343 h100
  text "www.lcogt.net" at 8088,-5453 h90
  text "DATE" at 5613,-5563.8 h32
  text "DESIGNED" at 6553,-5563.8 h32
  text "DRAWN" at 7633,-5563.8 h32
  text "SCALE" at 8713,-5563.8 h32
  text "NUMBER OF LAYERS" at -3622,-5593 h150
  text "5" at -72,-5593.02 h150
  text "Rich Lobdill" at 7938,-5663 h55
  text "Rich Lobdill" at 6813,-5668 h55
  text "1 : 1" at 8998,-5682 h90
  text "11/11/2011" at 5643,-5689 h90
  text "FINISHED THICKNESS" at -3622,-5843 h150
  text ".055\"" at -247,-5843 h150
  text "CHECKED/DATE" at 5613,-5853.8 h32
  text "APPROVED/DATE" at 7633,-5853.8 h32
  text "BASE MATERIAL" at -3622,-6093 h150
  text "FR4" at -322,-6093 h150
  text "TITLE" at 5613,-6143.8 h32
  text "175-00036, SUPER SNIFFER BOARD" at 5833,-6288 h100
  text "GOLD IMMERSION" at -816,-6310 h150
  text "PLATING TYPE" at -3622,-6343 h150
  text "THIS DRAWING EMBODIES A PROPRIETARY DESIGN OWNED BY LAS CUMBRES" at -11242,-6367 h60
  text "OBSERVATORY.  IT IS SUBMITTED FOR A SPECIFIC PURPOSE UNDER A CON-" at -11242,-6467 h60
  text "SIZE" at 5613,-6473.8 h32
  text "DOC NO." at 6073,-6473.8 h32
  text "REV" at 8153,-6473.8 h32
  text "SHEET" at 8613,-6473.8 h32
  text "FIDENTIAL RELATIONSHIP, AND EXCEPT FOR PURPOSES EXPRESSLY GRANTED" at -11242,-6562 h60
  text "OF" at 9043,-6577 h60
  text "SOLDER MASK COLOR" at -3622,-6593 h150
  text "BLACK" at -197,-6593 h150
  text "1" at 8873,-6597 h100
  text "X" at 9273,-6597 h100
  text "1" at 8298,-6610 h130
  text "-" at 6628,-6612 h130
  text "GPT" at 7347.72,-6626.8 h130
  text "C" at 5748,-6628 h100
  text "IN WRITING, ALL RIGHTS ARE RESERVED BY LAS CUMBRES OBSERVATORY." at -11242,-6652 h60
Mechanical 5:
  text "175-00036 rev1" at 2220.03,-810.42 h80
  text "LAS CUMBRES OBSERVATORY     11/11/2011" at 2220.03,-960.43 h80
Drill Drawing:
  lines w10: -11352,-6728 -11352,9272 9648,9272 9648,-6728 -11352,-6728 ; 5593,-6622 ccw(c5643,-6622) 5643,-6672 5973,-6672 ccw(c5973,-6632) 6013,-6632 6013,-6462 ccw(c5973,-6462) 5973,-6422 5593,-6422 5593,-6622 ; 5593,-6332 ccw(c5643,-6332) 5643,-6382 9543,-6382 ccw(c9543,-6332) 9593,-6332 9593,-6142 ccw(c9543,-6142) 9543,-6092 5593,-6092 5593,-6332 ; 5593,-6012 ccw(c5633,-6012) 5633,-6052 7053,-6052 ccw(c7053,-6002) 7103,-6002 7103,-5852 ccw(c7053,-5852) 7053,-5802 5593,-5802 5593,-6012 ; 6053,-6632 ccw(c6093,-6632) 6093,-6672 8053,-6672 ccw(c8053,-6632) 8093,-6632 8093,-6462 ccw(c8053,-6462) 8053,-6422 6053,-6422 6053,-6632 ; 7143,-6002 ccw(c7193,-6002) 7193,-6052 8603,-6052 ccw(c8603,-6002) 8653,-6002 8653,-5852 ccw(c8603,-5852) 8603,-5802 7143,-5802 7143,-6002 ; 8133,-6622 ccw(c8183,-6622) 8183,-6672 8513,-6672 ccw(c8513,-6632) 8553,-6632 8553,-6462 ccw(c8513,-6462) 8513,-6422 8133,-6422 8133,-6622 ; 8593,-6632 ccw(c8633,-6632) 8633,-6672 9543,-6672 ccw(c9543,-6622) 9593,-6622 9593,-6472 ccw(c9543,-6472) 9543,-6422 8593,-6422 8593,-6632 ; 8693,-6002 ccw(c8743,-6002) 8743,-6052 9543,-6052 ccw(c9543,-6002) 9593,-6002 9593,-5852 ccw(c9543,-5852) 9543,-5802 8693,-5802 8693,-6002
  lines w20: -11326.94,-6097.12 cw(c-11277,-6172) -11277,-6082 ; -11277,-6122 ccw(c-11277,-6172) -11327,-6172 -11327,-6662 ccw(c-11277,-6662) -11277,-6712 -8077,-6712 ccw(c-8077,-6662) -8027,-6662 -8027,-6322 ccw(c-8077,-6322) -8077,-6272 -10717,-6272 ; -8002.12,-6711.94 ccw(c-8077,-6662) -7987,-6662 -7987,-6322 ; 5547.92,-6710.66 cw(c5643,-6622) 5513,-6622 5513,-5802 cw(c5593,-5802) 5593,-5722 9543,-5722 cw(c9543,-5852) 9631.66,-5756.92 ; 5553,-6622 ccw(c5643,-6622) 5643,-6712 9543,-6712 ccw(c9543,-6622) 9633,-6622 9633,-5852 ccw(c9543,-5852) 9543,-5762 5593,-5762 ccw(c5593,-5802) 5553,-5802 5553,-6622
  lines w30: -11852,-7228 -11852,9772 10148,9772 10148,-7228 -11852,-7228
  text ".Legend" at -878,-2611 h100
  text "DESIGNED" at 5613,-5853.8 h32
  text "DRAWN" at 7163,-5853.8 h32
  text "SCALE" at 8713,-5853.8 h32
  text "Rich Lobdill" at 6099,-5950 h55
  text "Rich Lobdill" at 7660,-5952 h55
  text "1 : 1" at 8998,-5972 h90
  text "TITLE" at 5613,-6143.8 h32
  text "175-00036, SUPER SNIFFER BOARD" at 5830,-6288 h100
  text "THIS DRAWING EMBODIES A PROPRIETARY DESIGN OWNED BY LAS CUMBRES" at -11237,-6382 h60
  text "SIZE" at 5613,-6473.8 h32
  text "DOC NO." at 6073,-6473.8 h32
  text "REV" at 8153,-6473.8 h32
  text "SHEET" at 8613,-6473.8 h32
  text "OBSERVATORY.  IT IS SUBMITTED FOR A SPECIFIC PURPOSE UNDER A CON-" at -11237,-6482 h60
  text "FIDENTIAL RELATIONSHIP, AND EXCEPT FOR PURPOSES EXPRESSLY GRANTED" at -11237,-6577 h60
  text "OF" at 9043,-6577 h60
  text "2" at 8858,-6597 h100
  text "X" at 9273,-6597 h100
  text "-" at 6628,-6612 h130
  text "1" at 8293,-6612 h130
  text "C" at 5748,-6628 h120
  text "GD1" at 7448,-6628 h120
  text "IN WRITING, ALL RIGHTS ARE RESERVED BY LAS CUMBRES OBSERVATORY." at -11237,-6667 h60

## Dimensions
0,0 to 0,7874.02 on Mechanical 2
0,0 to 6299.21,0 on Mechanical 2

## Text inside footprints (layer, text, board x,y; h text height)
J1: Top Overlay "B1" at 2021.05,6815.81 h60; Top Overlay "B2" at 2021.05,6915.81 h60; Top Overlay "B59" at 5196.05,6815.81 h60; Top Overlay "B60" at 5196.05,6915.81 h60
J2: Mechanical 1 "J1" at 3304.03,3358.37 h30 r90
J3: Mechanical 1 "J1" at 2514.03,3358.37 h30 r90
J4: Top Overlay "B120" at 1021.05,1440.81 h60 r270; Top Overlay "B119" at 896.05,1440.81 h60 r270; Top Overlay "B62" at 1071.05,4540.81 h60 r90; Top Overlay "B61" at 971.05,4540.81 h60 r90
J5: Top Overlay "A59" at 5608.05,2030.81 h60 r90; Top Overlay "A60" at 5483.05,2030.81 h60 r90; Top Overlay "A1" at 5608.05,5305.81 h60 r90; Top Overlay "A2" at 5483.05,5280.81 h60 r90
J6: Top Overlay "A62" at 5428.05,1286.81 h60; Top Overlay "A61" at 5428.05,1161.81 h60; Top Overlay "A120" at 2128.05,1261.81 h60; Top Overlay "A119" at 2128.05,1161.81 h60
U1: Top Overlay "A1" at 3527.5,4057.21 h50 r90; Top Overlay "B1" at 2740.09,4057.21 h50 r90